# Altium PCB MAIN.PcbDoc
Units mil, origin at the board's own origin, x right, y up, seen from the top; angles counter-clockwise.
Board outline 2851.38 x 3216.54 mil, 4 copper layers (Top Layer, GND Plane, Power Plane, Bottom Layer), stack 66.28 mil thick; 62 components, 112 nets, 379 pads, 433 vias.
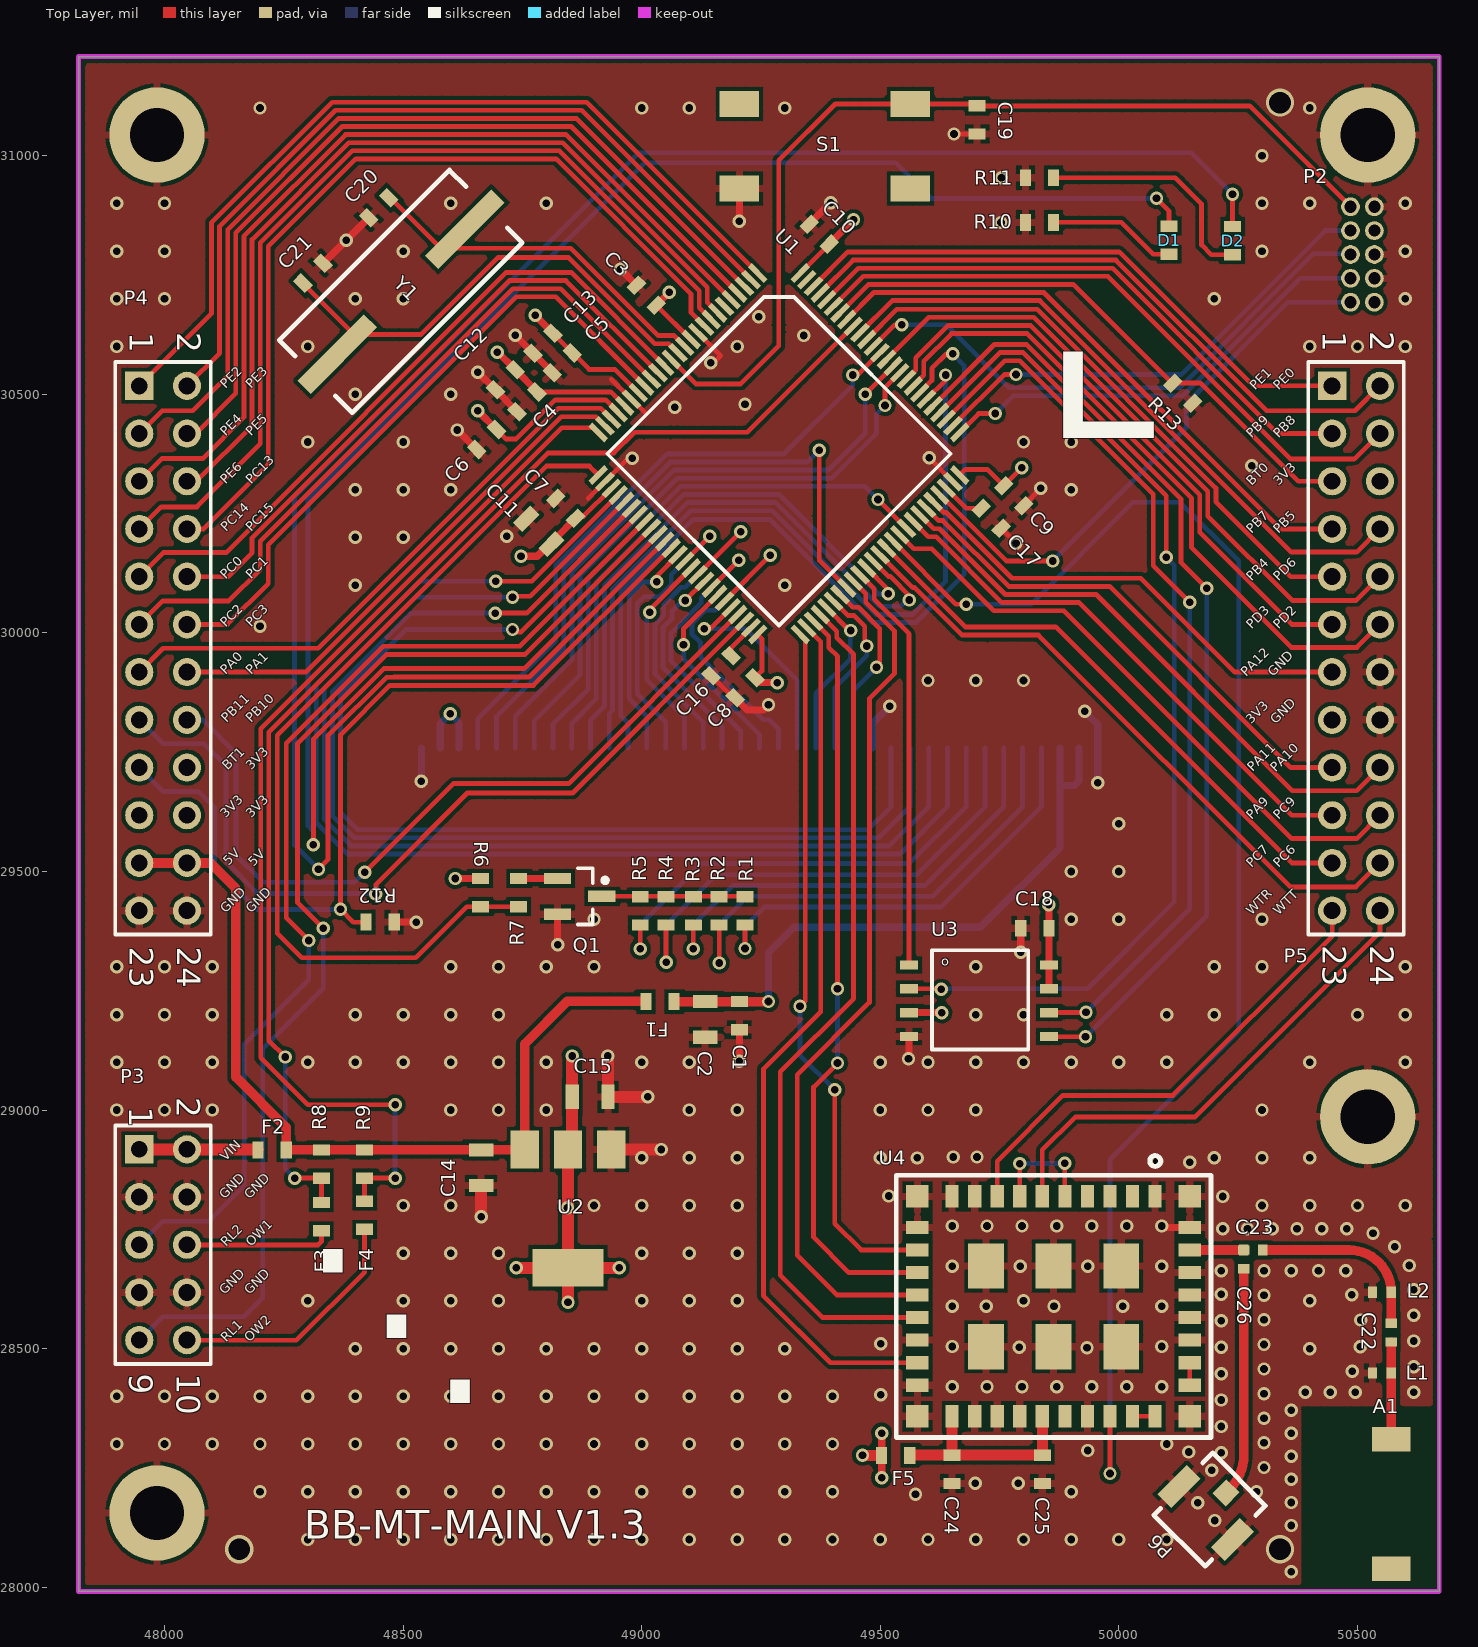
[diagram p0: Top Layer view]
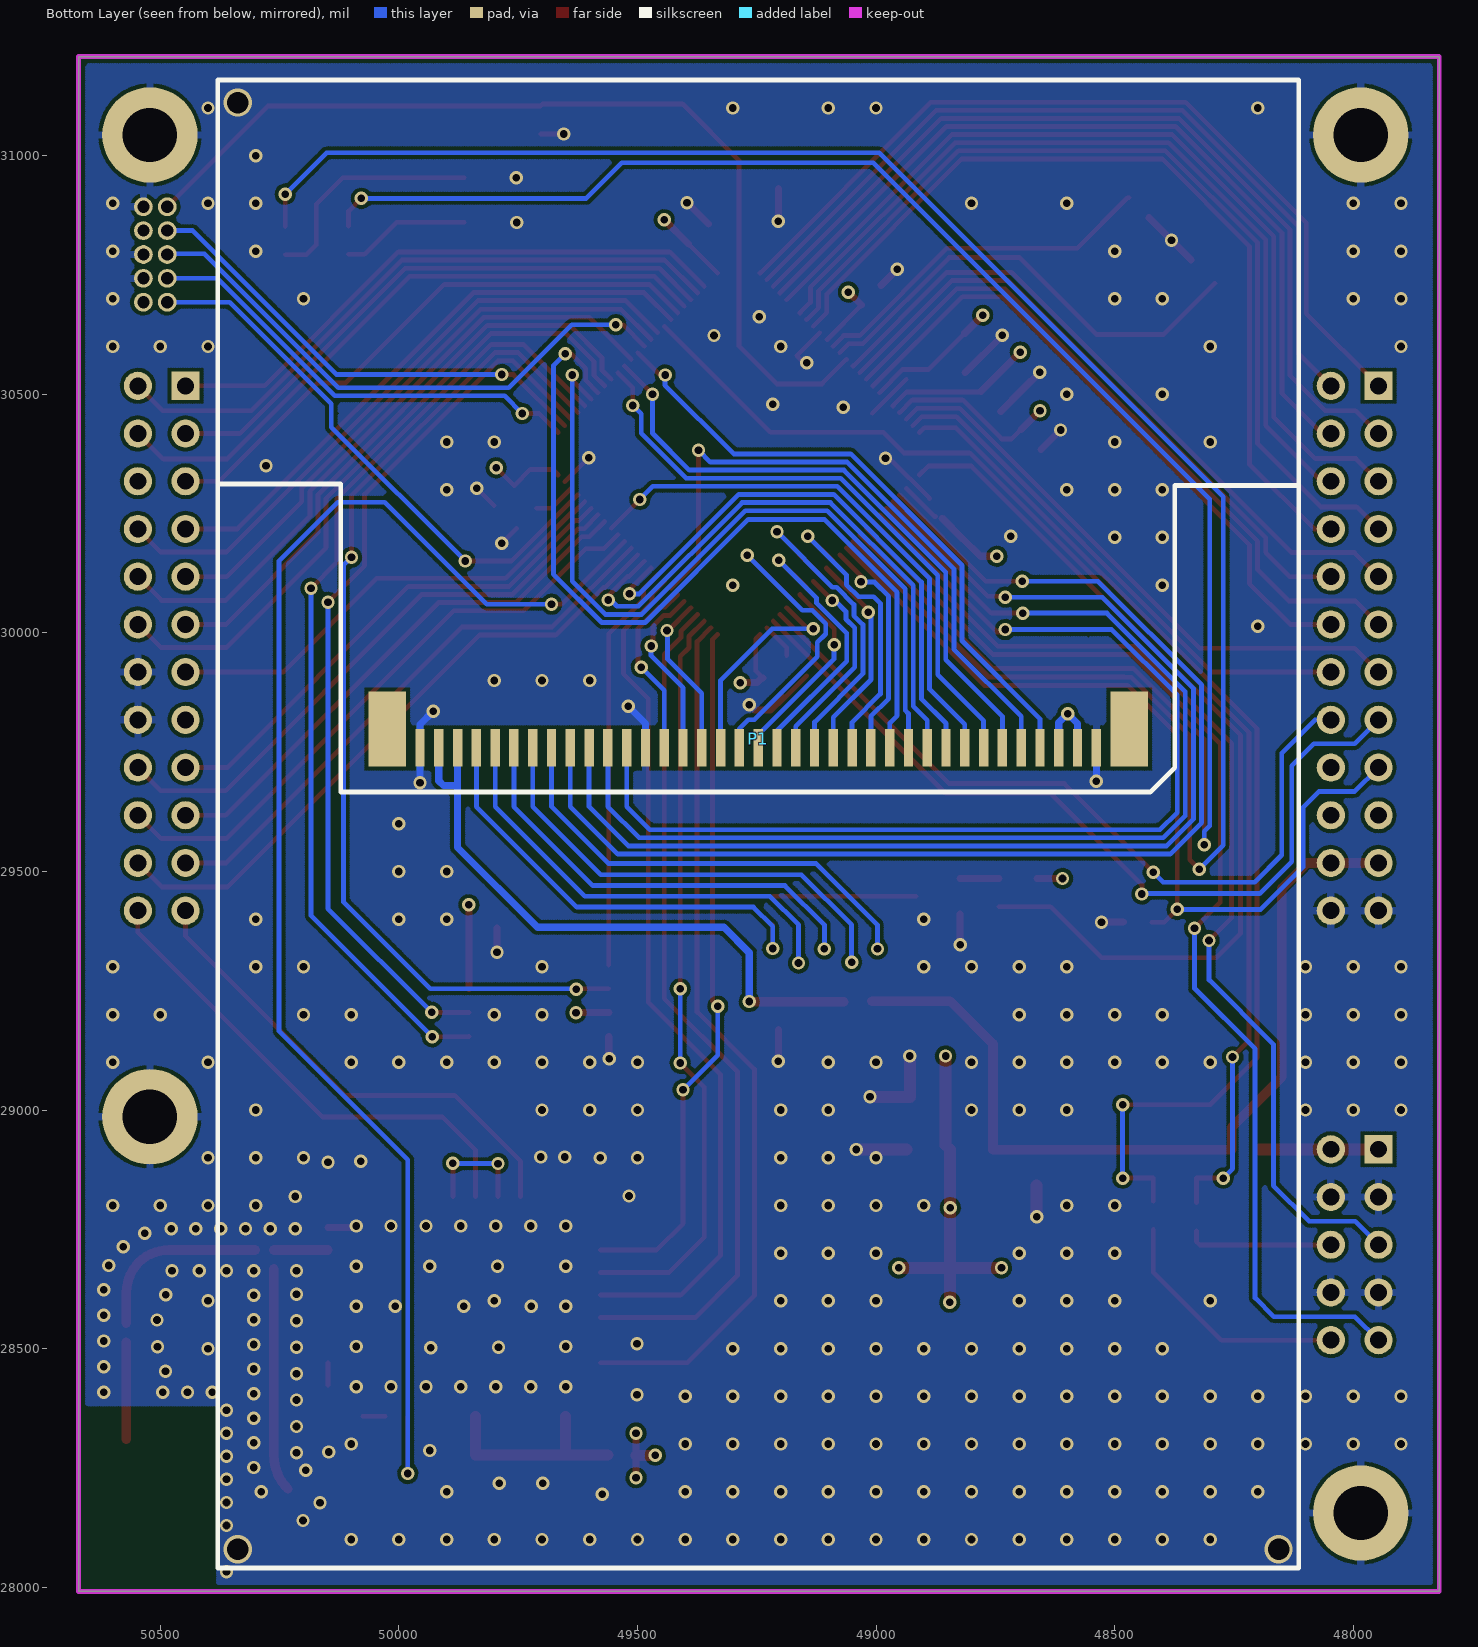
[diagram p1: Bottom Layer view, seen from below]
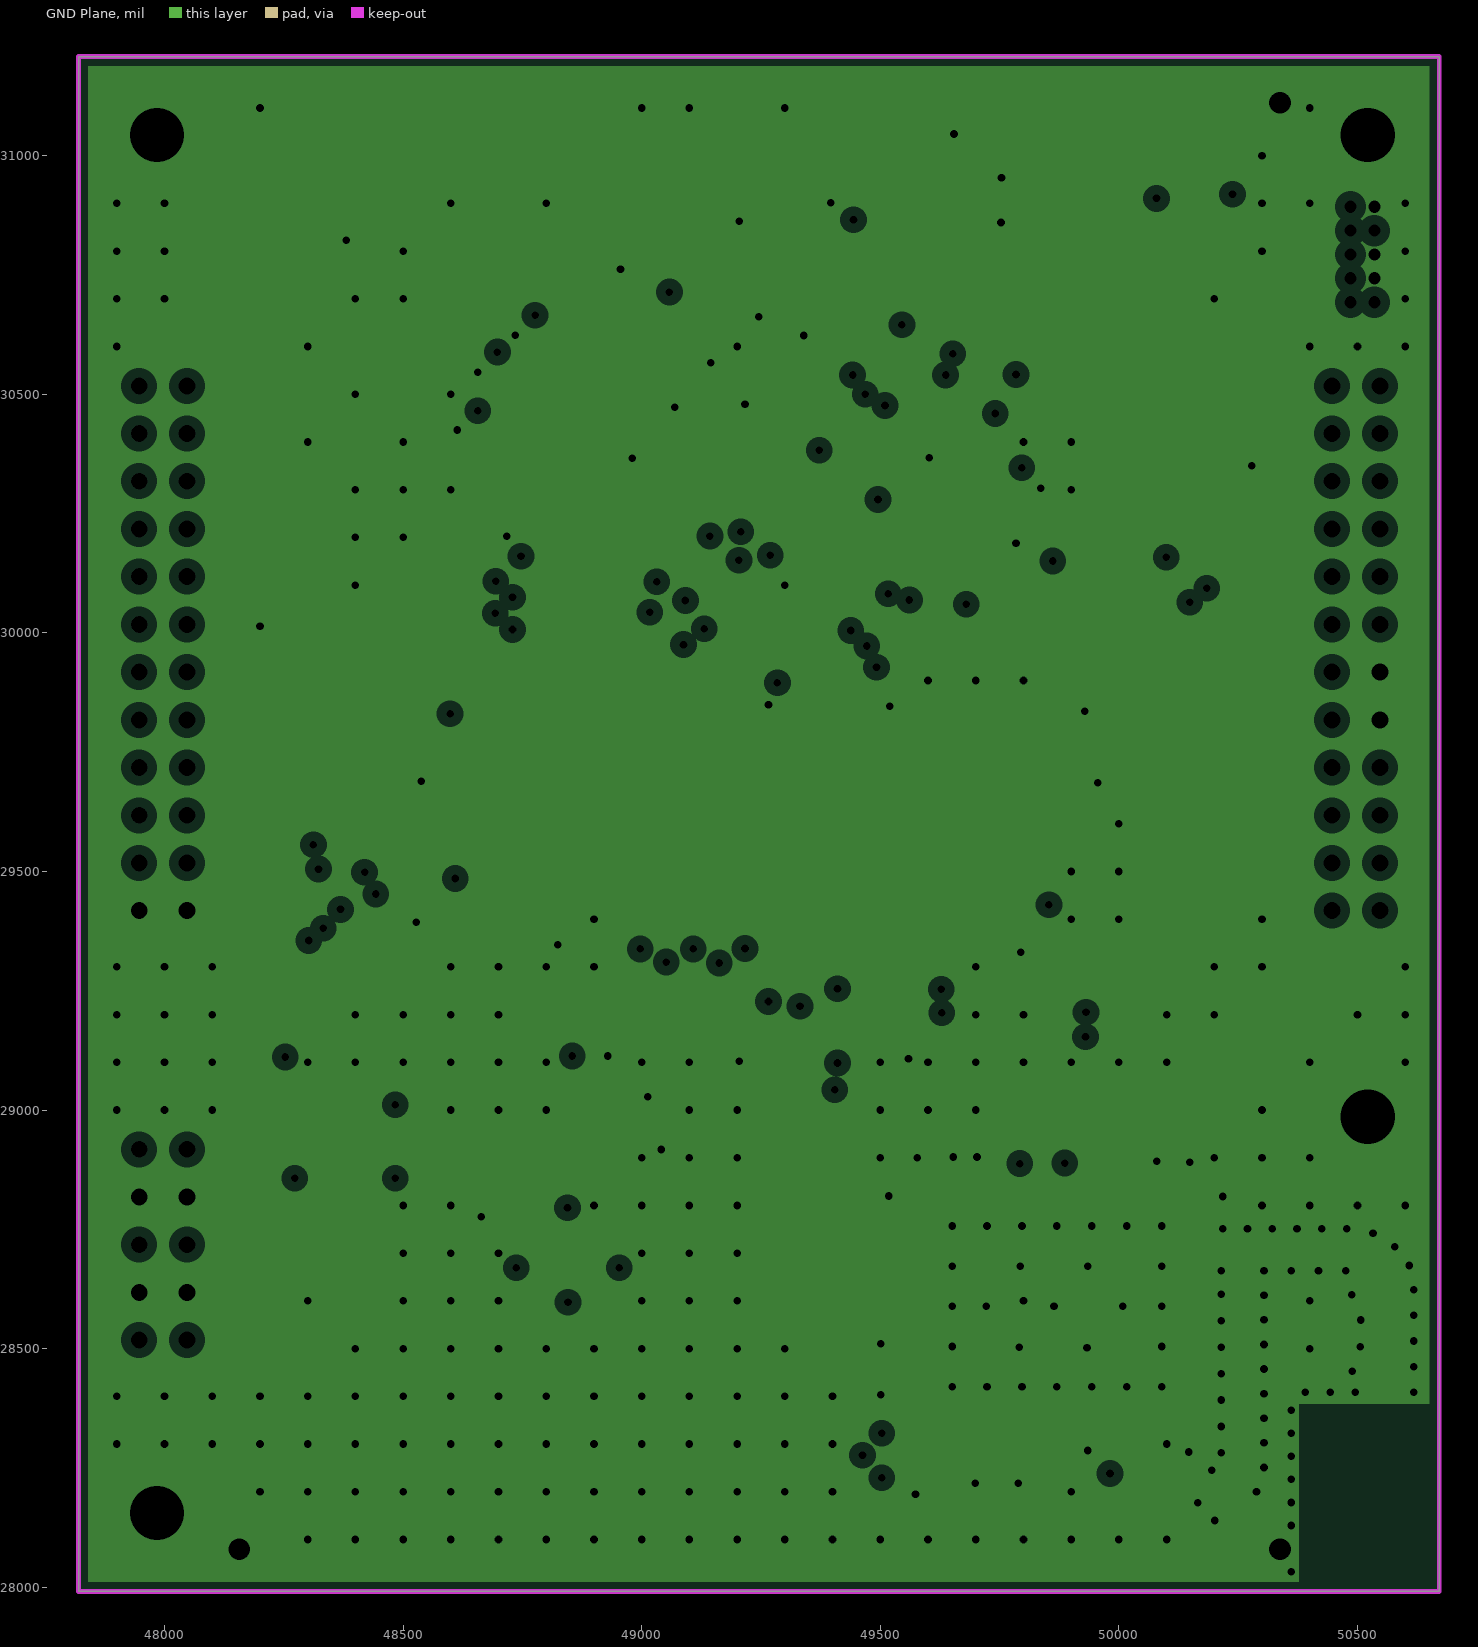
[diagram p2: GND Plane, clearances drawn from the general rule]
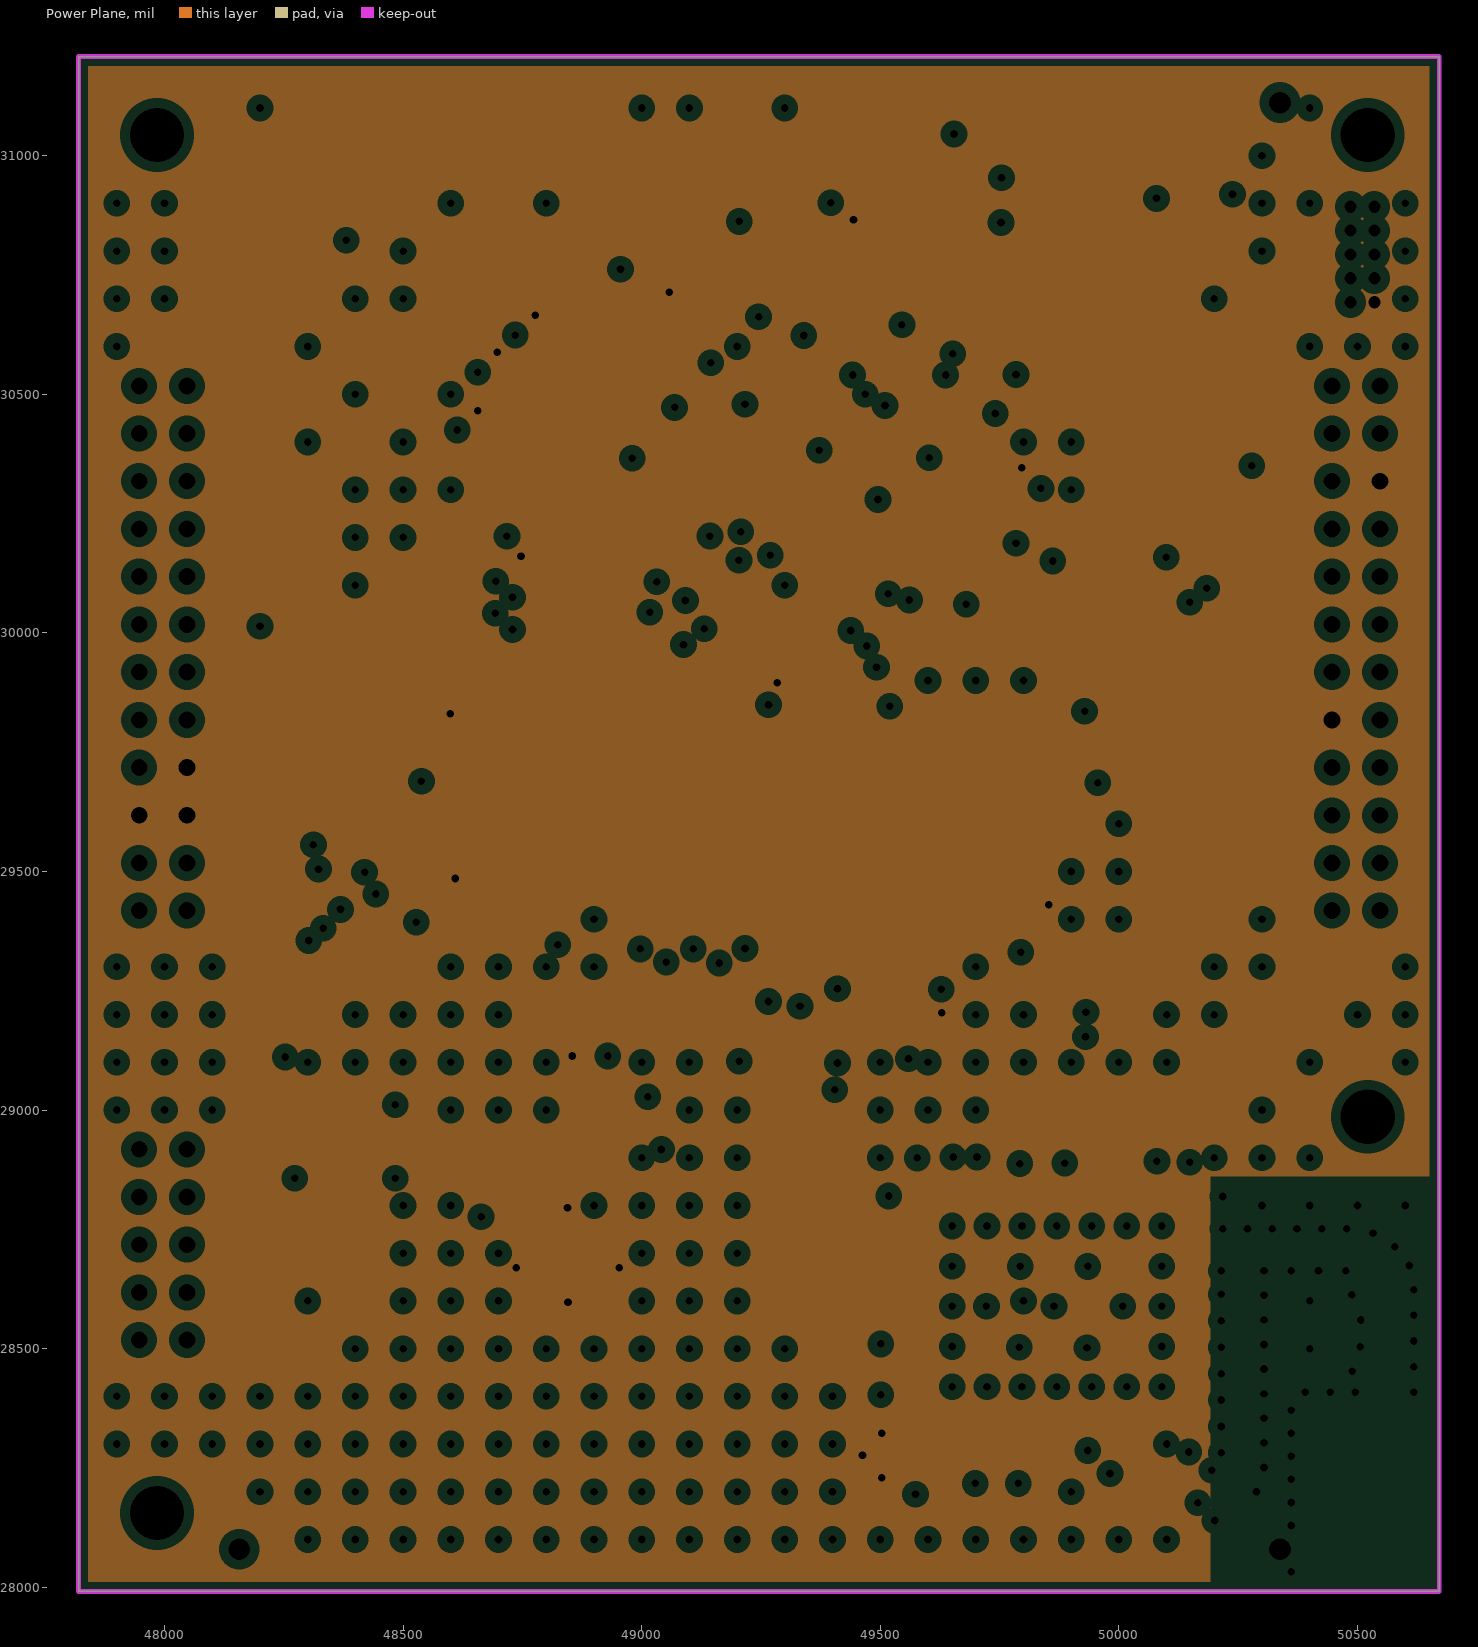
[diagram p3: Power Plane, clearances drawn from the general rule]

## Layer stack, top to bottom
Top Layer: signal copper 1.37
Dielectric: prepreg 12, 2-ply 2116, Dk 4.3
GND Plane: plane copper 1.37, net GND
Dielectric: core 39, FR-4, Dk 4.7
Power Plane: plane copper 1.37, net 3V3
Dielectric: prepreg 9.8, 2-ply 2116, Dk 4.5
Bottom Layer: signal copper 1.37

## Board outline
47819.88,27991.14 47819.88,31207.68 50671.26,31207.68 50671.26,27991.14

## Design rules (kind name [scope] priority, off if disabled: settings)
Clearance AntennaClearance [InNetClass('Antenna Feed-line')] p1: gap=15
Clearance PolygonClearance [InPolygon] p2: gap=8
Clearance [All] p3: gap=7
ComponentClearance [All] p1: gap=10 collisioncheckmode=3 verticalgap=0 showdistances=FALSE
HoleSize [All] p1: absolutevalues=TRUE maxlimit=250 minlimit=15 maxpercent=80.000 minpercent=20.000
MinimumAnnularRing [All] p1: minimumring=5
MinimumSolderMaskSliver FinePitchQFP [InComponent('U1') vs InComponent('U1')] p1: minsoldermaskwidth=3
MinimumSolderMaskSliver [All] p2: minsoldermaskwidth=10
PlaneClearance [All] p1: clearance=20
PlaneConnect [All] p1: planeconnectstyle=Direct reliefexpansion=20 reliefentries=4 reliefconductorwidth=10 reliefairgap=10
PolygonConnect ViaConnect [IsVia] p1: connectstyle=Direct reliefconductorwidth=10 reliefentries=4 polygonreliefangle="90 Angle"
PolygonConnect [All] p2: connectstyle=Relief reliefconductorwidth=15 reliefentries=4 polygonreliefangle="90 Angle"
RoutingPriority [InNet('GND')] p1: routingpriority=100
RoutingVias [All] p1: holewidth=15 width=20 viastyle="Through Hole" minholewidth=10 minwidth=15 maxholewidth=28 maxwidth=300
SMDNeckDown SMDNeckDown5v [InNet('5V')] p1: percent=100.000
SMDNeckDown SMDNeckDown3v3 [InNet('3V3')] p2: percent=100.000
SilkscreenOverComponentPads [All] p1: minsilkscreentomaskgap=10
SolderMaskExpansion [All] p1: expansion=4
Width Width_3V [InNet('3V3')] p1: maxlimit=25 minlimit=10 preferedwidth=25
Width Width_5V [InNet('5V')] p2: maxlimit=25 minlimit=10 preferedwidth=25
Width [All] p3: maxlimit=50 minlimit=10 preferedwidth=10
21 further rules are at their usual default settings.

## Classes and differential pairs
component class LCD: C1 C2 F1 P1 Q1 R1 R2 R3 R4 R5 R6 R7
component class WIFI: A1 C22 C23 C24 C25 C26 F5 L1 L2 P6 U4
component class MAIN: C3 C4 C5 C6 C7 C8 C9 C10 C11 C12 C13 C14 C15 C16 C17 C18 C19 C20 C21 D1 D2 F2 F3 F4 P2 P3 P4 P5 R8 R9 R10 R11 R12 R13 S1 U1 U2 U3 Y1

## Components (designator, comment, footprint, x,y, rotation, side; value= is the part's Value field where it differs from the comment)
A1 "Chip Antenna" 2500AT44M0400 50570.87,28310.04 r270 top
C1 "Cap" 0603 49204.72,29197.84 r90 top
C2 "Cap" 0805 49132.87,29189.96 r90 top
C3 "Cap" 0603 49009.84,30707.68 r315 top
C4 "Cap" 0603 48759.63,30484.04 r45 top
C5 "Cap" 0603 48833.45,30565.73 r45 top
C6 "Cap" 0603 48674.99,30405.3 r45 top
C7 "Cap" 0603 48840.55,30260.83 r315 top
C8 "Cap" 0603 49216.54,29884.84 r45 top
C9 "Cap" 0603 49779.53,30287.4 r135 top
C10 "Cap" 0603 49372.05,30835.63 r315 top
C11 "Cap" 0805 48784.45,30212.6 r315 top
C12 "Cap" 0603 48714.36,30530.3 r45 top
C13 "Cap" 0603 48793.1,30607.07 r45 top
C14 "Cap" 0805 48663.39,28878.94 r90 top
C15 "Cap" 0805 48891.73,29027.56 r180 top
C16 "Cap" 0603 49166.34,29931.1 r45 top
C17 "Cap" 0603 49732.28,30240.16 r135 top
C18 "Cap" 0603 49823.82,29380.91 r0 top
C19 "Cap" 0603 49702.76,31074.8 r90 top
C20 "Cap" 0603 48448.82,30890.75 r45 top
C21 "Cap" 0603 48311.02,30753.94 r225 top
C22 "Cap" 0402 50570.87,28533.46 r270 top
C23 "Cap" 0402 50281.5,28706.69 r0 top
C24 "Cap" 0603 49650.59,28247.05 r90 top
C25 "Cap" 0603 49839.57,28247.05 r90 top
C26 "Cap" 0402 50261.81,28687.01 r270 top
D1 "LED2" 0603 50105.32,30822.83 r270 top
D2 "LED2" 0603 50238.19,30821.85 r270 top
F1 "Ferrite Chip" 0603 49038.39,29227.36 r0 top
F2 "Ferrite Chip" 0603 48225.39,28916.34 r0 top
F3 "Ferrite Chip" 0603 48328.74,28776.57 r270 top
F4 "Ferrite Chip" 0603 48419.29,28779.53 r270 top
F5 "Ferrite Chip" 0603 49532.28,28276.18 r180 top
L1 "Inductor" 0402 50551.18,28448.82 r0 top
L2 "Inductor" 0402 50551.18,28618.11 r0 top
P1 "ER-TFT032-2" INANBO-T32-ILI9320-V11 49247.05,28040.35 r0 bottom locked
P2 "MCU JTAG" "JTAG PTH" 50535.43,30692.91 r180 top
P3 "PWR_BRD" HDR2X5 47947,28917.72 r270 top
P4 "Header 12X2" HDR2X12 47947,30517.72 r270 top locked
P5 "Header 12X2" HDR2X12 50447,30517.72 r270 top locked
P6 "Header 3" U.FL-R-SMT-1 50224.41,28197.83 r135 top
Q1 "NPN" SOT23_M 48870.08,29447.84 r0 top
R1 "Res2" 0603 49216.54,29417.32 r270 top
R2 "Res2" 0603 49162.4,29417.32 r270 top
R3 "Res2" 0603 49108.27,29417.32 r270 top
R4 "Res2" 0603 49051.18,29417.32 r270 top
R5 "Res2" 0603 48997.05,29417.32 r270 top
R6 "Res2" 0603 48662.4,29455.71 r90 top
R7 "Res2" 0603 48742.13,29455.71 r270 top
R8 "Res2" 0603 48328.74,28886.81 r90 top
R9 "Res2" 0603 48419.29,28886.81 r90 top
R10 "Res2" 0603 49833.66,30860.24 r0 top
R11 "Res2" 0603 49833.66,30953.74 r0 top
R12 "Res2" 0603 48451.77,29393.7 r180 top
R13 "Res2" 0603 50133.86,30501.97 r135 top
S1 "SW-PB" FSM4JSMA 49383.86,31019.68 r90 top
U1 "STM32F205" LQFP-100 49243.11,30753.94 r315 top locked
U2 "NCP1117LP" SOT-223 48845.47,28917.32 r180 top
U3 "S25FL032P" SOC008 49545.28,29304.13 r0 top
U4 "CC3000" CC3000 50148.62,28818.9 r270 top locked
Y1 "XTAL" "HC49SD XTAL" 48494.09,30716.54 r45 top

## Footprints (in the part's own frame and the unit in brackets; to place one, negate y for a bottom-side part, rotate by r counter-clockwise, add the part's x,y. Pads: shape width x height; smd on the part's side, far side on the other; paste and mask are expansions set on the pad)
0402 [mm]
  rect 0.5x0.6 smd: 1(-0.5,0) 2(0.5,0)
0603 [mm]
  rect 0.6x0.9 smd: 1(-0.75,0) 2(0.75,0)
0805 [mm]
  rect 0.7x1.3 smd: 1(-0.95,0) 2(0.95,0)
2500AT44M0400 [mm] "2.4 GHz Chip Antenna"
  rect 1.3x2.05 smd: 1(0,0) 2(6.9,0)
CC3000 [mm] "CC3000 WLAN Module"
  rect 1.2x0.7 smd: 1(0,-1.85) 2(0,-3.05) 3(0,-4.25) 4(0,-5.45) 5(0,-6.65) 6(0,-7.85) 7(0,-9.05) 8(0,-10.25) 9(0,-11.45) 10(0,-12.65) 19(11.7,-12.65) 20(11.7,-11.45) 21(11.7,-10.25) 22(11.7,-9.05) 23(11.7,-7.85) 24(11.7,-6.65) 25(11.7,-5.45) 26(11.7,-4.25) 27(11.7,-3.05) 28(11.7,-1.85)
  rect 0.7x1.2 smd: 11(1.65,-14.5) 12(2.85,-14.5) 13(4.05,-14.5) 14(5.25,-14.5) 15(6.45,-14.5) 16(7.65,-14.5) 17(8.85,-14.5) 18(10.05,-14.5) 29(10.05,0) 30(8.85,0) 31(7.65,0) 32(6.45,0) 33(5.25,0) 34(4.05,0) 35(2.85,0) 36(1.65,0)
  rect 2.4x1.9 smd: 37(3.7,-3.65) 38(3.7,-7.25) 39(3.7,-10.85) 40(8,-3.65) 41(8,-7.25) 42(8,-10.85)
  rect 1.2x1.2 smd: 43(0,0) 44(0,-14.5) 45(11.7,-14.5) 46(11.7,0)
  silkscreen extent -2.18,-15.63 12.83,1.13
FSM4JSMA [mm] "SWITCH TACTILE SPST-NO 0.05A 12V"
  rect 1.4x2.1 smd: 1(-2.25,4.55) 2(2.25,-4.55) ""(-2.25,-4.55) ""(2.25,4.55)
"HC49SD XTAL" [mm] "8 MHz Crystal"
  rect 5x1 smd: 1(-4.75,0) 2(4.75,-0.1)
  silkscreen extent -6.4,-2.78 6.4,2.7
HDR2X5 [mm] "Connector; Header; 5x2 Position"
  rect 1.5x1.5 hole 0.9: 1(0,0)
  round 1.5 hole 0.9: 2(0,2.54) 3(2.54,0) 4(2.54,2.54) 5(5.08,0) 6(5.08,2.54) 7(7.62,0) 8(7.62,2.54) 9(10.16,0) 10(10.16,2.54)
  silkscreen extent -1.27,-1.27 11.43,3.81
HDR2X12 [mm] "Connector; Header; 12x2 Position"
  rect 1.5x1.5 hole 0.9: 1(0,0)
  round 1.5 hole 0.9: 2(0,2.54) 3(2.54,0) 4(2.54,2.54) 5(5.08,0) 6(5.08,2.54) 7(7.62,0) 8(7.62,2.54) 9(10.16,0) 10(10.16,2.54) 11(12.7,0) 12(12.7,2.54) 13(15.24,0) 14(15.24,2.54) 15(17.78,0) 16(17.78,2.54) 17(20.32,0) 18(20.32,2.54) 19(22.86,0) 20(22.86,2.54) 21(25.4,0) 22(25.4,2.54) 23(27.94,0) 24(27.94,2.54)
  silkscreen extent -1.27,-1.27 29.21,3.81
INANBO-T32-ILI9320-V11 [mm] "INANBO 3.2\" TFT LCD"
  rect 0.5x2 smd: 1(-18,-43.65) 2(-17,-43.65) 3(-16,-43.65) 4(-15,-43.65) 5(-14,-43.65) 6(-13,-43.65) 7(-12,-43.65) 8(-11,-43.65) 9(-10,-43.65) 10(-9,-43.65) 11(-8,-43.65) 12(-7,-43.65) 13(-6,-43.65) 14(-5,-43.65) 15(-4,-43.65) 16(-3,-43.65) 17(-2,-43.65) 18(-1,-43.65) 19(0,-43.65) 20(1,-43.65) 21(2,-43.65) 22(3,-43.65) 23(4,-43.65) 24(5,-43.65) 25(6,-43.65) 26(7,-43.65) 27(8,-43.65) 28(9,-43.65) 29(10,-43.65) 30(11,-43.65) 31(12,-43.65) 32(13,-43.65) 33(14,-43.65) 34(15,-43.65) 35(16,-43.65) 36(17,-43.65) 37(18,-43.65)
  rect 2x4 smd: ""(-19.755,-44.65) ""(19.745,-44.65)
  silkscreen extent -28.77,-79.2 28.77,0
"JTAG PTH" [mm]
  round 1 hole 0.65 mask+0: 1(0,0) 2(1.27,0) 3(0,-1.27) 4(1.27,-1.27) 5(0,-2.54) 6(1.27,-2.54) 7(0,-3.81) 8(1.27,-3.81) 9(0,-5.08) 10(1.27,-5.08)
LQFP-100 [mm]
  rect 1.2x0.3 smd mask+0.05: 1(0,0) 2(0,-0.5) 3(0,-1) 4(0,-1.5) 5(0,-2) 6(0,-2.5) 7(0,-3) 8(0,-3.5) 9(0,-4) 10(0,-4.5) 11(0,-5) 12(0,-5.5) 13(0,-6) 14(0,-6.5) 15(0,-7) 16(0,-7.5) 17(0,-8) 18(0,-8.5) 19(0,-9) 20(0,-9.5) 21(0,-10) 22(0,-10.5) 23(0,-11) 24(0,-11.5) 25(0,-12) 51(15.2,-12) 52(15.2,-11.5) 53(15.2,-11) 54(15.2,-10.5) 55(15.2,-10) 56(15.2,-9.5) 57(15.2,-9) 58(15.2,-8.5) 59(15.2,-8) 60(15.2,-7.5) 61(15.2,-7) 62(15.2,-6.5) 63(15.2,-6) 64(15.2,-5.5) 65(15.2,-5) 66(15.2,-4.5) 67(15.2,-4) 68(15.2,-3.5) 69(15.2,-3) 70(15.2,-2.5) 71(15.2,-2) 72(15.2,-1.5) 73(15.2,-1) 74(15.2,-0.5) 75(15.2,0)
  rect 0.3x1.2 smd mask+0.05: 26(1.6,-13.6) 27(2.1,-13.6) 28(2.6,-13.6) 29(3.1,-13.6) 30(3.6,-13.6) 31(4.1,-13.6) 32(4.6,-13.6) 33(5.1,-13.6) 34(5.6,-13.6) 35(6.1,-13.6) 36(6.6,-13.6) 37(7.1,-13.6) 38(7.6,-13.6) 39(8.1,-13.6) 40(8.6,-13.6) 41(9.1,-13.6) 42(9.6,-13.6) 43(10.1,-13.6) 44(10.6,-13.6) 45(11.1,-13.6) 46(11.6,-13.6) 47(12.1,-13.6) 48(12.6,-13.6) 49(13.1,-13.6) 50(13.6,-13.6) 76(13.6,1.6) 77(13.1,1.6) 78(12.6,1.6) 79(12.1,1.6) 80(11.6,1.6) 81(11.1,1.6) 82(10.6,1.6) 83(10.1,1.6) 84(9.6,1.6) 85(9.1,1.6) 86(8.6,1.6) 87(8.1,1.6) 88(7.6,1.6) 89(7.1,1.6) 90(6.6,1.6) 91(6.1,1.6) 92(5.6,1.6) 93(5.1,1.6) 94(4.6,1.6) 95(4.1,1.6) 96(3.6,1.6) 97(3.1,1.6) 98(2.6,1.6) 99(2.1,1.6) 100(1.6,1.6)
  silkscreen extent 1.14,-12.46 14.06,0.46
SOC008 [mm]
  rect 0.962x0.495 smd: 1(0.381,0) 2(0.381,-1.27) 3(0.381,-2.54) 4(0.381,-3.81) 5(7.82,-3.81) 6(7.82,-2.54) 7(7.82,-1.27) 8(7.82,0)
  silkscreen extent 1.6,-4.51 6.73,0.77
SOT23_M [mm] "SOT23, 3-Leads, Body 2.9x1.3mm, Pitch 0.95mm, Lead Span 2.3mm - Reverse Pinning, IPC Low Density"
  rect 1.45x0.6 smd: 1(1.175,0) 2(-1.175,-0.95) 3(-1.175,0.95)
  silkscreen extent -0.1,-1.5 1.48,1.5, body extent -0.7,-1.5 0.7,1.5, height 1.1
SOT-223 [mm]
  rect 1.5x2 smd: 1(-2.3,0) 2(0,0) 3(2.3,0)
  rect 3.8x2 smd: 4(0,6.3)
U.FL-R-SMT-1 [mm] "U.FL Connector"
  rect 1.05x2.2 smd: 1(-2,1.525) 3(2,1.525)
  rect 1x1.05 smd: 2(0,0)
  silkscreen extent -1.98,-1 2,3.55

## Part data
A1: library part ANT-SMT-2
C1 C2 C3 C4 C5 C6 C7 C8 C9 C10 C11 C12 C13 C14 C15 C16 C17 C18 C19 C20 C21 C22 C23 C24 C25 C26: "Capacitor"
D1 D2: "Typical RED, GREEN, YELLOW, AMBER GaAs LED"
F1 F2 F3 F4 F5: library part Res2
P1: "3.2\" TFT LCD module with touch panel"
P2 P3: library part "Header 5X2", "Header, 5-Pin, Dual row"
P4 P5: "Header, 12-Pin, Dual row"
P6: "Header, 3-Pin"
Q1: "NPN Bipolar Transistor"
R1 R2 R3 R4 R5 R6 R7 R8 R9 R10 R11 R12 R13: "Resistor"
S1: "Switch"
U1: library part STM32F20x-LQFP100, "STMicroelectronics STM32F20x LQFP100"
U2: "1.0 A Low-Dropout Positive  Fixed and Adjustable  Voltage Regulators"
U3: library part M25P80-VMN6TP, "IC FLASH 8MBIT 75MHZ SO8N"
U4: "CC3000 WLAN Module"
Y1: "Crystal Oscillator"

## Free pads (board coordinates)
  round 200 hole 114.17: ""(47984.25,28155.51) ""(47984.25,31043.31) ""(50521.65,31043.31) ""(50521.65,28985.83)

## Via types
v1: diameter 28, hole 16, Top Layer to Bottom Layer, tented both sides, 430 vias
v2: diameter 59.06, hole 45.28, Top Layer to Bottom Layer, tented both sides, 3 vias

## Nets (pads, with @x,y where several pads share a name; then routed paths per layer and width w, separated by ;. In a path a pad name is that pad's centre, name@x,y a point inside that pad or via, vN(x,y) a via of type N, cw(c..) or ccw(c..) an arc to the next point about the centre after c; other vN are vias at no path point)
3V3: C3.2 C4.2 C5.2 C6.2 C7.2 C8.2 C9.2 C10.2 C11.2 C12.2 C13.2 C15.2 C18.2 F5.2 P1.2 P1.3 P2.1 P4.18 P4.19 P4.20 P5.6 P5.15 R6.2 U1.11 U1.19 U1.21 U1.22 U1.28 U1.50 U1.75 U1.100 U2.2 U2.4 U3.3 U3.7 U3.8 | length 3121
  Top Layer w10: C6.2 48715.55,30406.5 48737.08,30406.5 48818.77,30488.19 48924.24,30488.19 U1.22 ; C4.2 48935.35,30504.92 U1.21 ; C13.2 48889.76,30552.17 48943.78,30552.17 U1.19 ; C11.2@48818.77,30197.96 C11.2@48819.45,30197.96 ; C7.2@48875.3,30243.88 48877.82,30243.88 U1.28 ; C3.2 U1.11@49102.78,30614.74 ; C8.2 49251.97,29920.28 49251.97,29987.86 U1.50 ; U1.100 C10.2@49392.93,30814.67 ; U1.75 49677.99,30342.52 49724.41,30342.52 C9.2 v1(49796.26,30345.89)
  Top Layer w15: v1(48609.25,29485.24) R6.2 ; v1(48656.5,30465.55) C6.2 ; v1@48698.05,30588.37 C12.2 C4.2@48780.51,30505.91 ; v1(48747.05,30160.43) 48781.24,30160.43 C11.2@48818.77,30197.96 ; v1(48776.57,30665.35) C13.2 ; C11.2@48819.45,30197.96 C7.2 ; C3.2 v1(49058.07,30714.15) ; C8.2 49238.91,29905.72 49248.97,29895.67 v1(49284.45,29895.67) ; C10.2 v1(49443.9,30865.72) ; v1(49502.95,28229.33) F5.2@49502.95,28275.98 ; F5.2@49502.95,28276.39 v1(49502.95,28322.83) ; U3.3 v1@49628.54,29204.13 ; U3.7@49853.35,29254.33 C18.2 v1(49853.35,29430.12)
  Top Layer w23: v1@49462.6,28276.18 F5.2
  Top Layer w25: v1(48737.2,28669.29) U2.4 ; v1(48845.47,28597.44) U2.4 ; U2.2 U2.4 ; U2.2@48854.33,28926.18 C15.2 v1(48854.33,29113.19) ; v1(48952.76,28669.29) U2.4
  Bottom Layer w15: P1.2 48577.76,29810.04 v1(48598.43,29830.71) 48617.13,29812.01 P1.3
  other v1: 49462.6,28276.57 48844.49,28795.28 49628.94,29203.74 48697.62,30588.37
5V: C14.2 F1.1 F2.2 P4.21 P4.22 R8.2 R9.2 U2.3 | length 1829
  Top Layer w20: P4.21 48096.46,29517.72 48149.61,29464.57 48149.61,29068.9 48254.92,28963.58 F2.2 U2.3@48754.92,28916.34 ; U2.3 48754.92,29138.78 48844.49,29228.35 F1.1@49008.86,29228.35
BOOT0: P5.5 R13.2 U1.94 | length 1248.4
  Top Layer w10: U1.94 49475.52,30730.23 49904.61,30730.23 50111.22,30523.62 50170.28,30523.62 50376.18,30317.72 P5.5@50468.5,30317.72
BOOT1: P4.17 R12.2 U1.37 | length 1903.8
  Top Layer w10: R12.2 48395.67,29393.7 v1(48368.91,29420.46) 48368.91,29786.24 48472.44,29889.76 48773.14,29889.76 49061.05,30177.67 U1.37
  Bottom Layer w10: P4.17 47997.39,29667.32 48071.85,29667.32 48105.32,29633.86 48105.32,29508.86 48193.72,29420.46 v1(48368.91,29420.46)
D0: P1.9 U1.61 | length 1239.6
  Top Layer w10: U1.61 49516.73,30090.57 v1(49516.73,30081.69)
  Bottom Layer w10: P1.9 48853.35,29810.04 48904.88,29861.57 48904.88,30106.36 49088.52,30290 49287.76,30290 49496.06,30081.69 49523.64,30081.69 49516.73,30088.6 v1(49516.73,30081.69)
D1: P1.10 U1.62 | length 1281
  Top Layer w10: U1.62 49517.03,30118.11 49520.67,30118.11 49562.99,30075.79 49560.04,30072.83 49561.02,30071.85 v1(49561.02,30068.9)
  Bottom Layer w10: P1.10 48892.72,29816.93 48921.88,29846.09 48921.88,30099.32 49095.57,30273 49280.71,30273 49498.02,30055.69 49542.9,30055.69 49560.04,30072.83 49561.02,30071.85 v1(49561.02,30068.9)
D2: P1.11 U1.81 | length 1720.6
  Top Layer w10: U1.81 49636.81,30529.62 v1(49636.81,30540.35)
  Bottom Layer w10: P1.11 48932.09,29830.71 48938.88,29837.5 48938.88,30092.27 49102.61,30256 49273.67,30256 49490.98,30038.69 49567.59,30038.69 49636.81,30107.92 v1(49636.81,30540.35)
D3: P1.12 U1.82 | length 1836.6
  Top Layer w10: U1.82 49608.31,30528.96 49608.31,30554.18 49638.78,30584.65 v1(49651.57,30584.65)
  Bottom Layer w10: P1.12 48971.46,29811.02 48955.88,29826.6 48955.88,30085.23 49108.26,30237.61 49268.02,30237.61 49483.94,30021.69 49574.63,30021.69 49676.18,30123.24 49676.18,30560.04 v1(49651.57,30584.65)
D4: P1.13 U1.38 | length 465.7
  Top Layer w10: v1(49031.42,30107.28) 49031.42,30119.1 U1.38
  Bottom Layer w10: P1.13 49010.83,29824.8 48973.73,29861.9 48973.73,30076.93 49003.28,30106.47 v1@49018.8,30106.47
D5: P1.14 U1.39 | length 625
  Top Layer w10: U1.39 v1(49142.92,30202.76)
  Bottom Layer w10: P1.14 49050.2,29812.57 48990.73,29872.04 48990.73,30061.6 49004.92,30075.79 49036.69,30075.79 49062.01,30101.1 49062.01,30121.85 v1(49142.92,30202.76)
D6: P1.15 U1.40 | length 442.7
  Top Layer w10: v1(49016.73,30043.31) 49016.73,30048.73 U1.40
  Bottom Layer w10: v1@49010.6,30040.14 49010.6,29901.8 49089.57,29822.83 P1.15
D7: P1.16 U1.41 | length 701.2
  Top Layer w10: U1.41 v1(49207.45,30211.61)
  Bottom Layer w10: P1.16 49128.94,29812.99 49027.6,29914.33 49027.6,30017.4 49046.26,30036.07 49046.26,30059.35 49082.38,30095.47 49091.31,30095.47 v1(49207.45,30211.61)
D8: P1.17 U1.42 | length 439.6
  Top Layer w10: v1(49091.59,30067.91) U1.42
  Bottom Layer w10: v1(49091.59,30067.91) 49086.46,30067.91 49063.26,30044.72 49063.26,30029.02 49044.6,30010.36 49044.6,29927.84 49168.31,29804.13 P1.17
D9: P1.18 U1.43 | length 594.9
  Top Layer w10: U1.43 v1(49203.74,30152.22)
  Bottom Layer w10: v1(49203.74,30152.22) 49125,30073.48 49125,30062.83 49061.6,29999.43 49061.6,29940.37 49207.68,29794.29 P1.18
D10: P1.19 U1.44 | length 417.5
  Top Layer w10: v1(49087.6,29975.39) 49087.6,30008.24 U1.44
  Bottom Layer w10: v1(49087.6,29975.39) 49088.04,29975.39 49088.33,29975.1 49088.33,29945.13 49247.05,29786.42 P1.19
D11: P1.20 U1.45 | length 702.5
  Top Layer w10: U1.45 v1(49269.68,30162.49)
  Bottom Layer w10: v1(49269.68,30162.49) 49154.44,30047.24 49133.46,30047.24 49105.33,30019.12 49105.33,29997.58 49123.03,29979.89 49123.03,29949.8 49254.92,29817.91 49267.72,29817.91 49286.42,29799.21 P1.20
D12: P1.21 U1.46 | length 455.2
  Top Layer w10: v1(49131.33,30008.35) 49143.39,30008.35 U1.46
  Bottom Layer w10: v1(49131.33,30008.35) 49218.02,30008.35 49325.79,29900.59 P1.21
D13: P1.22 U1.55 | length 348.6
  Top Layer w10: U1.55 49435.35,30004.92 v1(49437.99,30004.92)
  Bottom Layer w10: P1.22 49365.16,29873.03 49437.01,29944.88 v1@49437.01,30007.87
D14: P1.23 U1.56 | length 370.1
  Top Layer w10: U1.56 49431.69,30036.42 49444.88,30036.42 49467.52,30013.78 v1@49467.52,29972.44
  Bottom Layer w10: P1.23 49404.53,29884.84 49471.46,29951.77 v1(49471.46,29972.44)
D15: P1.24 U1.57 | length 385.7
  Top Layer w10: U1.57 49442.53,30053.42 49454.46,30053.42 49499.02,30008.86 49499.02,29935.04 v1(49492.13,29928.15)
  Bottom Layer w10: P1.24 49443.9,29879.92 v1(49492.13,29928.15)
EXP_RX: P5.22 U1.63 | length 1357
  Top Layer w10: U1.63 49568.08,30094.9 49571.79,30094.9 49671.34,29995.35 49831.28,29995.35 50359.11,29467.52 50496.8,29467.52 P5.22
EXP_TX: P5.21 U1.64 | length 1207.2
  Top Layer w10: U1.64 49678.47,30012.35 49867.57,30012.35 50362.2,29517.72 P5.21
FLASH_CS: U1.60 U3.1 | length 860.4
  Top Layer w10: U1.60 49487.2,30092.26 49487.2,30070.87 49560.28,29997.8 U3.1
FLASH_MISO: U1.79 U3.2 | length 2140.6
  Top Layer w10: U3.2 v1@49626.77,29254.13 ; U1.79 49750.2,30587.33 49799.27,30587.33 50099.41,30287.19 v1(50099.41,30158.46)
  Bottom Layer w10: v1@49626.77,29254.13 49934.25,29254.13 50116.14,29436.02 50116.14,30141.73 v1(50099.41,30158.46)
  other v1: 49627.95,29252.95
FLASH_MOSI: U1.80 U3.5 | length 2038.7
  Top Layer w10: U1.80 49739.36,30604.33 49806.31,30604.33 50129.92,30280.72 50129.92,30147.64 v1(50184.06,30093.5) ; U3.5 49853.74,29153.54 v1(49930.12,29153.54)
  Bottom Layer w10: v1(49930.12,29153.54) 50184.06,29407.48 v1(50184.06,30093.5)
FLASH_SCK: U1.78 U3.6 | length 1885.3
  Top Layer w10: U1.78 49761.04,30570.33 49792.23,30570.33 50071.85,30290.71 50071.85,30140.75 v1(50148.62,30063.98) ; U3.6 v1@49930.51,29204.13
  Bottom Layer w10: v1(49931.1,29204.72) 50148.62,29422.24 v1(50148.62,30063.98)
GND: C1.1 C2.1 C3.1 C4.1 C5.1 C6.1 C7.1 C8.1 C9.1 C10.1 C11.1 C12.1 C13.1 C14.1 C15.1 C16.1 C17.1 C18.1 C19.1 C20.1 C21.1 C24.1 C25.1 L1.1 L2.1 P1.1 P1.25 P1.37 P2.3 P2.5 P2.9 P3.3 P3.4 P3.7 P3.8 P4.23 P4.24 P5.14 P5.16 P6.1 P6.3 pad. Q1.2 R10.1 R11.1 R12.1 R13.1 S1.1 U1.10 U1.20 U1.27 U1.74 U2.1 U3.4 U4.1 U4.9 U4.10 U4.11 U4.16 U4.18 U4.20 U4.21 U4.22 U4.25 U4.31 U4.32 U4.33 U4.34 U4.36 U4.37 U4.38 U4.39 U4.40 U4.41 U4.42 U4.43 U4.44 U4.45 U4.46 | length 2283.4
  Top Layer w10: 48887.8,30281.71 48972.24,30366.14 v1(48980.32,30366.14) ; 48936.61,30531.5 49008.11,30460 ; U1.10 49165.79,30580.71 49151.03,30565.94 v1(49145,30565.94) ; C16.1 49191.72,29863.96 C8.1 ; v1(49602.36,30366.85) U1.74 ; v1(49654.53,31045.28) C19.1 ; C17.1 v1(49784.45,30187.99) ; C9.1 v1(49836.61,30302.73)
  Top Layer w15: C21.1@48339.78,30781.71 C20.1 ; R12.1 v1(48527.56,29393.7) ; v1(48613.33,30425.2) C6.1 ; v1(48656.64,30546.26) C12.1 C4.1@48738.75,30464.15 ; v1(48735.24,30624.02) 48735.24,30623.18 C5.1@48813.06,30545.35 ; v1(48823.82,29346.46) Q1.2 ; v1(48955.71,30761.81) 48958.66,30758.86 C3.1 ; C8.1 49221.04,29838.58 49254.92,29838.58 v1(49265.75,29849.41) ; v1(49204.72,29102.36) C1.1 ; v1(49204.72,30862.2) S1.1 ; C10.1 v1(49396.23,30901.57) ; v1@49560.28,29108.5 U3.4 ; v1(49794.29,29330.71) C18.1 ; v1@50091.54,28753.94 U4.36
  Top Layer w25: v1(48663.39,28776.58) C14.1 ; v1(48929.13,29113.19) C15.1 v1(49012.79,29027.56) ; U2.1 v1(49041.34,28917.32)
  Bottom Layer w15: v1(48538.39,29688.98) P1.1 ; P1.25 49483.27,29810.04 v1(49519.68,29846.46) ; v1(49928.15,29835.63) 49955.71,29808.07 v1(49955.71,29686.02)
  other v1: 50361.22,28032.48 48300,28100 48400,28100 48500,28100 48600,28100 48700,28100 48800,28100 48900,28100 49000,28100 49100,28100 49200,28100 49300,28100 49400,28100 49500,28100 49600,28100 49700,28100 49800,28100 49900,28100 50000,28100 50100,28100 50361.22,28129.22 50200.79,28139.76 50165.35,28177.17 50361.22,28177.59 49573.82,28195 48200,28200 48300,28200 48400,28200 48500,28200 48600,28200 48700,28200 48800,28200 48900,28200 49000,28200 49100,28200 49200,28200 49300,28200 49400,28200 49900,28200 50288.39,28199.8 49698.82,28217.52 49789.37,28217.52 50361.22,28225.96 50194.88,28245.08 50304.13,28250.98 50361.22,28274.33 50214.57,28281.5 50146.65,28283.46 49935.04,28286.42 47900,28300 48000,28300 48100,28300 48200,28300 48300,28300 48400,28300 48500,28300 48600,28300 48700,28300 48800,28300 48900,28300 49000,28300 49100,28300 49200,28300 49300,28300 49400,28300 50100,28300 50304.13,28302.53 50361.22,28322.69 50214.57,28336.9 50304.13,28354.08 50361.22,28371.06 50214.57,28392.29 47900,28400 48000,28400 48100,28400 48200,28400 48300,28400 48400,28400 48500,28400 48600,28400 48700,28400 48800,28400 48900,28400 49000,28400 49100,28400 49200,28400 49300,28400 49400,28400 49500.98,28403.54 50304.13,28405.63 50390.75,28408.46 50442.91,28408.46 50495.08,28408.46 50618.11,28408.46 49650.59,28420.28 49723.75,28420.28 49796.92,28420.28 49870.08,28420.28 49943.24,28420.28 50016.4,28420.28 50089.57,28420.28 50214.57,28447.69 50489.17,28452.76 50304.13,28457.18 50618.11,28462.2 48400,28500 48500,28500 48600,28500 48700,28500 48800,28500 48900,28500 49000,28500 49100,28500 49200,28500 49300,28500 50400,28500 49933.07,28501.97 49791.34,28502.95 50214.57,28503.09 49650.59,28504.43 50089.57,28504.43 50505.91,28503.94 50304.13,28508.73 49500.98,28509.84 50618.11,28515.94 50214.57,28558.49 50304.13,28560.28 50506.89,28560.04 50618.11,28569.68 49650.59,28588.58 49722.44,28588.58 49864.17,28588.58 50007.87,28588.58 50089.57,28588.58 48300,28600 48500,28600 48600,28600 48700,28600 49000,28600 49100,28600 49200,28600 49800,28600 50400,28600 50304.13,28611.83 50488.19,28613.19 50214.57,28613.89 50618.11,28623.42 50214.57,28663.39 50304.13,28663.39 50361.22,28663.39 50418.31,28663.39 50475.39,28663.39 49793.31,28672.24 49935.04,28672.24 49650.59,28672.74 50089.57,28672.74 50608.27,28674.21 48500,28700 48600,28700 48700,28700 49000,28700 49100,28700 49200,28700 50577.76,28713.58 50532.48,28742.13 50217.52,28750.98 50269.49,28750.98 50321.46,28750.98 50373.43,28750.98 50425.39,28750.98 50477.36,28750.98 49650.59,28756.89 49723.75,28756.89 49796.92,28756.89 49870.08,28756.89 49943.24,28756.89 50016.4,28756.89 50089.57,28756.89 48500,28800 48600,28800 48900,28800 49000,28800 49100,28800 49200,28800 50300,28800 50400,28800 50500,28800 50600,28800 50217.52,28818.9 49517.72,28819.88 50148.62,28890.75 50079.72,28892.72 49000,28900 49100,28900 49200,28900 49500,28900 49577.76,28899.61 50200,28900 50300,28900 50400,28900 49652.56,28901.57 49702.76,28901.57 47900,29000 48000,29000 48100,29000 48600,29000 48700,29000 48800,29000 49100,29000 49200,29000 49500,29000 49600,29000 49700,29000 50300,29000 47900,29100 48000,29100 48100,29100 48300,29100 48400,29100 48500,29100 48600,29100 48700,29100 48800,29100 49000,29100 49100,29100 49500,29100 49600,29100 49700,29100 49800,29100 49900,29100 50000,29100 50100,29100 50400,29100 50600,29100 49559.06,29107.28 47900,29200 48000,29200 48100,29200 48400,29200 48500,29200 48600,29200 48700,29200 49700,29200 49800,29200 50100,29200 50200,29200 50500,29200 50600,29200 47900,29300 48000,29300 48100,29300 48600,29300 48700,29300 48800,29300 48900,29300 49700,29300 50200,29300 50300,29300 50600,29300 48900,29400 49900,29400 50000,29400 50300,29400 49900,29500 50000,29500 50000,29600 49600,29900 49700,29900 49800,29900 48200,30013.78 48400,30100 49300,30100 48400,30200 48500,30200 48717.52,30202.5 48400,30300 48500,30300 48600,30300 49900,30300 50278.54,30350.39 48300,30400 48500,30400 49800,30400 49900,30400 49068.9,30472.44 49216.54,30479.33 48400,30500 48600,30500 47900,30600 48300,30600 49200,30600 50400,30600 50500,30600 50600,30600 49339.57,30623.03 49245,30662.4 47900,30700 48000,30700 48400,30700 48500,30700 50200,30700 50600,30700 47900,30800 48000,30800 48500,30800 50300,30800 50600,30800 48380.91,30822.83 49752.95,30860 47900,30900 48000,30900 48600,30900 48800,30900 50300,30900 50400,30900 50600,30900 49753.94,30953.51 50300,31000 48200,31100 49000,31100 49100,31100 49300,31100 50400,31100
  other v2: 48156.5,28079.72 50337.6,28079.72 50337.6,31111.22
JTCK: P2.4 U1.76 | length 953
  Top Layer w10: U1.76 49706.03,30459.65 v1(49741.14,30459.65)
  Bottom Layer w10: v1(49741.14,30459.65) 49778.28,30496.78 50134.16,30496.78 50380.29,30742.91 P2.4
JTDI_MCU: P2.8 U1.77 | length 1002.6
  Top Layer w10: U1.77 49759.89,30541.34 v1(49784.45,30541.34)
  Bottom Layer w10: v1(49784.45,30541.34) 50130.63,30541.34 50432.21,30842.91 P2.8
JTDO_MCU: P2.6 U1.89 | length 1189.5
  Top Layer w10: U1.89 49530.15,30645.67 v1(49545.28,30645.67)
  Bottom Layer w10: v1(49545.28,30645.67) 49637.8,30645.67 49769.68,30513.78 50127.11,30513.78 50407.63,30794.29 P2.6@50485.43,30794.29
JTMS: P2.2 U1.72 | length 1171.7
  Top Layer w10: U1.72 49625.4,30289.03 49763.84,30150.59 v1(49861.22,30150.59)
  Bottom Layer w10: v1(49861.22,30150.59) 50141.73,30431.1 50141.73,30480.31 50354.33,30692.91 P2.2
LED_GRN: D1.1 U1.35 | length 4019.6
  Top Layer w10: v1(48312.01,29556.1) 48312.01,29777.41 48459.79,29925.2 48754,29925.2 U1.35 ; v1(50078.74,30910.43) 50105.31,30883.86 D1.1
  Bottom Layer w10: v1(48312.01,29556.1) 48312.01,29584.23 48300.91,29595.32 48300.91,30280.24 49005.91,30985.24 49532.48,30985.24 49607.28,30910.43 v1(50078.74,30910.43)
LED_RED: D2.1 U1.36 | length 4330.5
  Top Layer w10: v1(48322.83,29504.92) 48342.52,29524.61 48342.52,29783.88 48465.4,29906.76 48479.87,29906.76 48480.59,29907.48 48764.13,29907.48 U1.36 ; D2.1 v1(50238.19,30919.29)
  Bottom Layer w10: v1(48322.83,29504.92) 48272.64,29555.12 48272.64,30284.87 48993.68,31005.91 50151.57,31005.91 v1(50238.19,30919.29)
NetA1_1: A1.1 C22.2 L1.2 | length 203.7
  Top Layer w20: A1.1 C22.2
NetC1_2: C1.2 C2.2 F1.2 P1.35 P1.36 | length 1323.7
  Top Layer w20: F1.2 C1.2 v1(49265.75,29227.36)
  Bottom Layer w15: v1(49265.75,29227.36) 49265.75,29329.72 49318.9,29382.87 49709.65,29382.87 49876.97,29550.2 49876.97,29680.12 ; P1.35 49876.97,29680.12 ; P1.36 49916.34,29689.96 49906.5,29680.12 49876.97,29680.12
NetC16_2: C16.2 U1.49 | length 76
  Top Layer w10: C16.2 49187.22,29968.67 U1.49
NetC17_2: C17.2 U1.73 | length 90.3
  Top Layer w10: U1.73 49680.33,30261.04 C17.2
NetC20_2: C20.2 U1.12 Y1.2 | length 749
  Top Layer w10: C20.2 48473.07,30911.63 48578.67,30806.03 48851.45,30806.03 49034.62,30622.86 49067.96,30622.86 U1.12
NetC21_2: C21.2 U1.13 Y1.1 | length 980.3
  Top Layer w10: C21.2@48289.94,30732.85 48397.71,30625.07 48537.48,30625.07 48698.82,30786.42 48847.02,30786.42 49027.57,30605.86 49057.12,30605.86 U1.13
NetC22_1: C22.1 C23.2 L2.2 | length 385.2
  Top Layer w20: C23.2 50482.28,28706.69 cw(c50482.28,28618.11) L2.2 C22.1
NetC23_1: C23.1 C26.1 U4.35 | length 113.2
  Top Layer w20: U4.35 C26.1
NetC24_2: C24.2 C25.2 F5.1 U4.19 U4.23 | length 442.7
  Top Layer w15: C24.2 ccw(c49651.57,28276.57) C24.2@49651.57,28275.59
  Top Layer w23: F5.1@49561.8,28276.58 C24.2 ; U4.19 C24.2 ; U4.23 C25.2 C24.2
NetC26_2: C26.2 P6.2 | length 469.2
  Top Layer w20: P6.2@50232.52,28205.95 ccw(c50161.81,28276.66) 50261.81,28276.66 C26.2
NetD1_2: D1.2 R10.2 | length 269.8
  Top Layer w10: R10.2 50004.92,30860.24 50071.85,30793.31 D1.2
NetD2_2: D2.2 R11.2 | length 492
  Top Layer w10: R11.2 50118.11,30953.74 50173.23,30898.62 50173.23,30812.99 50193.9,30792.32 D2.2
NetF3_2: F3.2 P3.6 | length 307.5
  Top Layer w10: P3.6@48046.85,28717.32 48321.65,28717.32 48328.74,28724.41 F3.2
NetF4_2: F4.2 P3.10 | length 521.3
  Top Layer w10: P3.10@48046.85,28517.32 48276.18,28517.32 48419.29,28660.43 F4.2
NetP1_30: P1.30 R5.2 | length 1009.2
  Top Layer w10: v1(48997.05,29337.6) R5.2
  Bottom Layer w10: v1(48997.05,29337.6) 48997.05,29387.8 49125.98,29516.73 49560.98,29516.73 49680.12,29635.87 P1.30
NetP1_31: P1.31 R4.2 | length 1049.6
  Top Layer w10: v1(49051.18,29310.04) R4.2
  Bottom Layer w10: v1(49051.18,29310.04) 49051.18,29387.8 49156.5,29493.11 49576.73,29493.11 49719.49,29635.87 P1.31
NetP1_32: P1.32 R3.2 | length 976.7
  Top Layer w10: v1(49108.27,29337.6) R3.2
  Bottom Layer w10: v1(49108.27,29337.6) 49108.27,29387.79 49190.95,29470.47 49593.46,29470.47 49758.86,29635.87 P1.32
NetP1_33: P1.33 R2.2 | length 1021
  Top Layer w10: v1(49162.4,29308.07) R2.2
  Bottom Layer w10: v1(49162.4,29308.07) 49162.4,29387.79 49222.44,29447.83 49610.2,29447.83 49798.23,29635.87 P1.33
NetP1_34: P1.34 R1.2 | length 943.5
  Top Layer w10: v1(49216.54,29338.58) R1.2
  Bottom Layer w10: v1(49216.54,29338.58) 49216.54,29384.84 49256.89,29425.2 49626.93,29425.2 49837.6,29635.87 P1.34
NetQ1_1: Q1.1 R1.1 R2.1 R3.1 R4.1 R5.1 | length 299.2
  Top Layer w10: Q1.1 R1.1@49215.55,29447.83
NetQ1_2: Q1.3 R7.1 | length 81.7
  Top Layer w15: R7.1 Q1.3
NetU4_5: U4.5 U4.7 | length 232.3
  Top Layer w10: U4.7 v1(49792.32,28887.8) ; U4.5 v1(49886.81,28888.78)
  Bottom Layer w10: v1(49792.32,28887.8) v1@49885.83,28887.8
NetU4_27: U4.27 U4.28 | length 47.2
  Top Layer w10: U4.27 U4.28
NetU4_29: U4.29 U4.30 | length 47.2
  Top Layer w10: U4.29 U4.30
OW1: F3.1 R8.1 U1.92 | length 2641.6
  Top Layer w10: v1(48252.95,29111.22) 48218.5,29145.67 48218.5,29791.76 48803.71,30376.97 48941.93,30376.97 48985.24,30420.28 49221.24,30420.28 U1.92 ; v1(48272.64,28857.28) R8.1 F3.1
  Bottom Layer w10: v1(48252.95,29111.22) 48252.95,28876.97 v1(48272.64,28857.28)
OW2: F4.1 R9.1 U1.25 | length 2250.7
  Top Layer w10: F4.1 R9.1 v1(48483.27,28857.28) ; v1(48483.27,29010.83) 48300.2,29010.83 48201.5,29109.52 48201.5,29798.8 48832.55,30429.85 48899.07,30429.85 U1.25
  Bottom Layer w10: v1(48483.27,28857.28) v1(48483.27,29010.83)
PA0: P4.13 U1.23 | length 1228.3
  Top Layer w10: P4.13 47996.8,29967.52 48322.14,29967.52 48825.09,30470.47 48914.12,30470.47 U1.23
PA1: P4.14 U1.24 | length 1105.4
  Top Layer w10: P4.14 48296.38,29917.72 48831.41,30452.75 48904.01,30452.75 U1.24
PA9: P5.19 U1.68 | length 1133.2
  Top Layer w10: U1.68 49600.98,30201.2 49617.07,30201.2 49754.92,30063.35 49916.97,30063.35 50362.6,29617.72 P5.19
PA10: P5.18 U1.69 | length 1223.7
  Top Layer w10: U1.69 49611.82,30218.2 49624.11,30218.2 49761.96,30080.35 49952.13,30080.35 50363.19,29669.29 50498.57,29669.29 P5.18
PA11: P5.17 U1.70 | length 1075.5
  Top Layer w10: U1.70 49622.66,30235.2 49631.15,30235.2 49769,30097.35 49980.41,30097.35 50360.04,29717.72 P5.17
PA12: P5.13 U1.71 | length 984.5
  Top Layer w10: U1.71 49633.49,30252.2 49638.19,30252.2 49776.04,30114.35 50046.09,30114.35 50242.72,29917.72 P5.13
PB4: P5.9 U1.90 | length 1250.7
  Top Layer w10: U1.90 49534.8,30678.15 49828.66,30678.15 50203.47,30303.33 50203.47,30274.87 50360.63,30117.72 P5.9
PB5: P5.8 U1.91 | length 1355.8
  Top Layer w10: U1.91 49525.04,30696.23 49834.62,30696.23 50361.56,30169.29 50498.57,30169.29 P5.8
PB7: P5.7 U1.93 | length 1267.6
  Top Layer w10: U1.93 49486.36,30713.23 49842.87,30713.23 50338.39,30217.72 P5.7@50468.5,30217.72
PB8: P5.4 U1.95 | length 1352.1
  Top Layer w10: U1.95 49464.68,30747.23 49977.18,30747.23 50360.24,30364.17 50493.46,30364.17 P5.4
PB9: P5.3 U1.96 | length 1251.5
  Top Layer w10: U1.96 49453.84,30764.23 49986.9,30764.23 50333.41,30417.72 P5.3@50468.5,30417.72
PB10: P4.16 U1.47 | length 1652.9
  Top Layer w10: v1(48419.29,29498.03) 48605.31,29684.06 48846.93,29684.06 U1.47
  Bottom Layer w10: P4.16 48079.92,29817.72 48149.61,29748.03 48149.61,29534.45 48206.69,29477.36 48398.62,29477.36 v1(48419.29,29498.03)
PB11: P4.15 U1.48 | length 1785
  Top Layer w10: v1(48442.91,29452.76) 48442.91,29472.44 48634.84,29664.37 48855.08,29664.37 U1.48
  Bottom Layer w10: P4.15 47997,29767.72 48082.68,29767.72 48128.94,29721.46 48128.94,29520.67 48195.87,29453.74 v1@48442.91,29453.74
PC0: P4.9 U1.15 | length 1446.5
  Top Layer w10: P4.9 47997.59,30168.31 48128.94,30168.31 48715.82,30755.19 48852.11,30755.19 U1.15
PC1: P4.10 U1.16 | length 1342.5
  Top Layer w10: P4.10 48133.46,30117.72 48183.52,30167.77 48183.52,30198.85 48722.86,30738.19 48841.28,30738.19 U1.16
PC2: P4.11 U1.17 | length 1478.2
  Top Layer w10: P4.11 47996.21,30066.93 48134.84,30066.93 48200.52,30132.61 48200.52,30191.81 48729.9,30721.19 48830.44,30721.19 U1.17
PC3: P4.12 U1.18 | length 1368.9
  Top Layer w10: P4.12 48131.89,30017.72 48217.52,30103.35 48217.52,30184.76 48736.94,30704.19 48819.6,30704.19 U1.18
PC9: P5.20 U1.66 | length 1289.9
  Top Layer w10: U1.66 49570.32,30176.18 49608.27,30176.18 49738.1,30046.35 49884.76,30046.35 50362.2,29568.9 50498.18,29568.9 P5.20
PC13: P4.6 U1.7 | length 1801
  Top Layer w10: P4.6@48047,30317.62 48066.63,30317.62 48183.43,30434.41 48183.43,30824.04 48386.49,31027.11 48834.54,31027.11 49137.52,30724.13 49137.52,30692.5 U1.7
PC14: P4.7 U1.8 | length 1940.6
  Top Layer w10: P4.7 47993.06,30263.78 48067.91,30263.78 48200.43,30396.29 48200.43,30817 48393.53,31010.11 48827.5,31010.11 49120.52,30717.09 49120.52,30681.66 U1.8
PC15: P4.8 U1.9 | length 1841.6
  Top Layer w10: P4.8 48081.89,30217.72 48217.43,30353.25 48217.43,30809.96 48400.57,30993.11 48820.46,30993.11 49103.52,30710.05 49103.52,30670.82 U1.9
PD2: P5.12 U1.83 | length 1394.1
  Top Layer w10: U1.83 49591.31,30539.79 49591.31,30569.03 49649.44,30627.15 49807.53,30627.15 50152.47,30282.21 50152.47,30178.24 50361.22,29969.49 50498.77,29969.49 P5.12
PD3: P5.11 U1.84 | length 1259.4
  Top Layer w10: U1.84 49574.31,30550.63 49574.31,30576.07 49642.39,30644.15 49814.57,30644.15 50169.47,30289.25 50169.47,30210.45 50362.2,30017.72 P5.11
PD6: P5.10 U1.87 | length 1367
  Top Layer w10: U1.87 49601.31,30661.15 49821.62,30661.15 50186.47,30296.29 50186.47,30244.63 50363.19,30067.91 50497.2,30067.91 P5.10
PE0: P5.2 U1.97 | length 1354
  Top Layer w10: U1.97 49443,30781.23 49993.94,30781.23 50309.62,30465.55 50494.83,30465.55 P5.2
PE1: P5.1 U1.98 | length 1233
  Top Layer w10: U1.98 49432.16,30798.23 50000.98,30798.23 50281.5,30517.72 P5.1
PE2: P4.1 U1.1 | length 1802
  Top Layer w10: P4.1 48098.43,30669.14 48098.43,30859.25 48351.28,31112.11 48884.94,31112.11 U1.1
PE3: P4.2 U1.2 | length 1724.3
  Top Layer w10: P4.2 48115.43,30586.14 48115.43,30852.21 48358.32,31095.11 48874.1,31095.11 U1.2
PE4: P4.3 U1.3 | length 1867
  Top Layer w10: P4.3 47994.84,30465.55 48059.06,30465.55 48132.43,30538.92 48132.43,30845.17 48365.37,31078.11 48863.26,31078.11 U1.3
PE5: P4.4 U1.4 | length 1762.4
  Top Layer w10: P4.4 48065.35,30417.72 48149.43,30501.79 48149.43,30838.13 48372.41,31061.11 48852.42,31061.11 U1.4
PE6: P4.5 U1.5 | length 1906.7
  Top Layer w10: P4.5 47994.44,30365.16 48079.72,30365.16 48166.43,30451.86 48166.43,30831.09 48379.45,31044.11 48841.58,31044.11 U1.5
RELAY1: P3.9 U1.34 | length 2461.2
  Top Layer w10: v1(48332.68,29380.91) 48278.64,29434.94 48278.64,29768.09 48465.28,29954.72 48755.69,29954.72 U1.34
  Bottom Layer w10: P3.9@47946.85,28517.32 47996.46,28566.93 48166.34,28566.93 48205.71,28606.3 48205.71,29127.95 48332.68,29254.92 v1(48332.68,29380.91)
RELAY2: P3.5 U1.33 | length 2218.4
  Top Layer w10: v1(48302.17,29355.31) 48254.92,29402.56 48254.92,29768.41 48458.24,29971.72 48744.85,29971.72 U1.33
  Bottom Layer w10: P3.5@47946.85,28717.32 47996.26,28766.73 48092.52,28766.73 48167.32,28841.54 48167.32,29137.8 48302.17,29272.64 v1(48302.17,29355.31)
RESET: C19.2 P2.10 S1.2 U1.14 | length 1998.9
  Top Layer w10: U1.14 49113.49,30521.65 49207.68,30521.65 49287.4,30601.38 49287.4,30990.16 49405.51,31108.27 S1.2 C19.2@49698.82,31108.27 ; C19.2 50274.01,31104.33 P2.10
TFT_BKLT: R6.1 R7.2 U1.26 | length 1900.1
  Top Layer w10: R6.1 48633.86,29426.18 48526.57,29318.9 48287.4,29318.9 48236.22,29370.08 48236.22,29785.43 48800.2,30349.41 48890.42,30349.41 U1.26 ; R6.1@48663.39,29426.18 R7.2
TFT_CS: P1.4 U1.88 | length 1320.8
  Top Layer w10: v1@49447.76,30535.43 U1.88
  Bottom Layer w10: P1.4 48656.5,29819.88 48819.88,29983.27 48819.88,30141.57 49053.32,30375 49298.23,30375 49442.5,30519.28 49442.5,30533.06 v1@49445.87,30536.42
  other v1: 49441.93,30540.35
TFT_RD: P1.7 U1.85 | length 1293.3
  Top Layer w10: v1(49509.84,30476.38) 49509.84,30514 U1.85
  Bottom Layer w10: P1.7 48774.61,29815.95 48870.88,29912.22 48870.88,30120.44 49074.44,30324 49398.06,30324 49492.13,30418.07 49492.13,30458.66 v1(49509.84,30476.38)
TFT_RS: P1.5 U1.58 | length 1384.7
  Top Layer w10: v1(49372.05,30382.87) 49372.05,30151.74 U1.58
  Bottom Layer w10: P1.5 48695.87,29824.81 48836.88,29965.82 48836.88,30134.52 49060.36,30358 49347.17,30358 v1(49372.05,30382.87)
TFT_RST: P1.8 U1.67 | length 1168
  Top Layer w10: v1@49495.44,30278.9 U1.67
  Bottom Layer w10: P1.8 48813.98,29808.07 48887.88,29881.98 48887.88,30113.4 49081.48,30307 49467.61,30307 v1(49495.08,30279.53)
TFT_WR: P1.6 U1.86 | length 1320.8
  Top Layer w10: v1@49466.03,30498.03 U1.86
  Bottom Layer w10: P1.6 48735.24,29824.81 48853.88,29943.45 48853.88,30127.48 49067.4,30341 49391.01,30341 49468.5,30418.49 v1(49468.5,30500)
VIN: F2.1 P3.1 P3.2 | length 249
  Top Layer w25: P3.1@47946.85,28917.32 48046.85,28917.32 F2.1@48195.87,28917.32
WIFI_CS: U1.51 U4.12 | length 1469.9
  Top Layer w10: v1(49331.69,29217.52) 49342.52,29228.35 49342.52,29986.4 U1.51 ; v1(49404.53,29042.32) 49404.53,28761.81 49459.65,28706.69 U4.12
  Bottom Layer w10: v1(49331.69,29217.52) 49331.69,29115.16 v1(49404.53,29042.32)
WIFI_IRQ: U1.59 U4.14 | length 1818.8
  Top Layer w10: U1.59 49469.45,30082.18 49469.45,30064.02 49529.53,30003.94 49529.53,29914.37 49477.36,29862.2 49477.36,29225.39 49325.79,29073.82 49325.79,28695.87 49409.45,28612.2 U4.14
WIFI_MISO: U1.53 U4.13 | length 1581.1
  Top Layer w10: U1.53 49392,29992.59 49392,29969.22 49410.43,29950.79 v1(49410.43,29253.94) ; v1(49410.43,29098.43) 49360.24,29048.23 49360.24,28733.27 49434.06,28659.45 U4.13
  Bottom Layer w10: v1(49410.43,29098.43) v1(49410.43,29253.94)
WIFI_MOSI: U1.54 U4.15 | length 1801.6
  Top Layer w10: U1.54 49409,30003.43 49409,29989.62 49443.9,29954.72 49443.9,29233.27 49290.35,29079.72 49290.35,28653.54 49378.94,28564.96 U4.15
WIFI_SCK: U1.52 U4.17 | length 1842.2
  Top Layer w10: U1.52 49375,29981.76 49375,29205.71 49255,29085.71 49255,28611.14 49395.67,28470.47 U4.17
WIFI_SW_EN: U1.65 U4.26 | length 3062
  Top Layer w10: U1.65 49658.62,30060.04 v1(49680.12,30060.04) ; v1(49981.3,28238.19) U4.26
  Bottom Layer w10: v1(49680.12,30060.04) 49815.94,30060.04 50029.53,30273.62 50127.95,30273.62 50250.98,30150.59 50250.98,29165.35 49981.3,28895.67 49981.3,28881.93 v1(49981.3,28238.19)
WTR: P5.23 U4.8 | length 1024.5
  Top Layer w10: U4.8 49745.08,28892.72 49882.87,29030.51 50113.19,29030.51 50447,29364.32 P5.23
WTT: P5.24 U4.6 | length 1038.9
  Top Layer w10: U4.6 49839.57,28916.34 49908.46,28985.24 50159.45,28985.24 50547,29372.79 P5.24
X+: P1.29 U1.29 | length 2600.7
  Top Layer w10: v1(48693.9,30108.27) 48770.04,30108.27 U1.29
  Bottom Layer w10: v1(48693.9,30108.27) 48535.16,30108.27 48317.91,29891.02 48317.91,29602.36 48383.86,29536.42 49541.3,29536.42 49640.75,29635.87 P1.29
X-: P1.27 U1.31 | length 2425.6
  Top Layer w10: v1(48692.91,30041.34) 48758.79,30041.34 U1.31
  Bottom Layer w10: v1(48692.91,30041.34) 48516.31,30041.34 48351.91,29876.94 48351.91,29616.45 48397.94,29570.42 49496.56,29570.42 49562.01,29635.87 P1.27
Y+: P1.28 U1.30 | length 2514.3
  Top Layer w10: v1(48729.33,30074.8) 48729.33,30076.77 48766.38,30076.77 U1.30
  Bottom Layer w10: v1(48729.33,30074.8) 48525.74,30074.8 48334.91,29883.98 48334.91,29609.4 48390.9,29553.42 49518.93,29553.42 49601.38,29635.87 P1.28
Y-: P1.26 U1.32 | length 2350.6
  Top Layer w10: v1(48729.33,30006.89) 48729.33,30005.91 48725.39,30001.97 48747.26,30001.97 U1.32
  Bottom Layer w10: v1(48729.33,30006.89) 48505.91,30006.89 48368.91,29869.9 48368.91,29623.49 48404.98,29587.42 49474.19,29587.42 49522.64,29635.87 P1.26
pads on no net: A1.2 P1. P2.7 S1. U1.6 U1.99 U4.2 U4.3 U4.4 U4.24

## Polygon pours and split planes (outlines as drawn)
GND on Top Layer "Top Layer-No Net" (hatched 90Degree grid 5 track 10, remove dead copper, pour order 4): 47819.88,31207.68 50671.26,31207.68 50671.26,27991.14 47819.88,27991.14 47819.88,31207.68
GND on Bottom Layer "Top Layer-No Net" (hatched 90Degree grid 5 track 10, remove dead copper, pour order 2): 47819.88,31207.68 50671.26,31207.68 50671.26,27991.14 47819.88,27991.14 47819.88,31207.68
GND on GND Plane (split plane): 50651.16,28383.86 50377.95,28383.86 50377.95,28011.24 47839.98,28011.24 47839.98,31187.58 50651.16,31187.58
3V3 on Power Plane (split plane): 50651.16,28860 50192.24,28860 50192.24,28011.24 47839.98,28011.24 47839.98,31187.58 50651.16,31187.58

## Keep-outs
Keep-Out Layer:
  the board outline again, w10

## Other copper
GND Plane (plane layer: these items are gaps in the copper):
  pour cut-out: 50377.95,28383.86 50377.95,27995.08 50671.26,27995.08 50671.26,28383.86
Power Plane (plane layer: these items are gaps in the copper):
  pour cut-out: 50192.24,27995.08 50671.26,27995.08 50671.26,28860 50192.24,28860
Multi-Layer:
  pour cut-out: 50671.26,28383.86 50671.26,27995.08 50377.95,27995.08 50377.95,28383.86

## Silkscreen, mask and mechanical layers (free items; w line width, h text height)
Top Overlay:
  text "PE2" at 48127.81,30510.83 h20 r45
  text "PE3" at 48182.09,30510.83 h20 r45
  text "PE1" at 50285.37,30506.89 h20 r45
  text "PE0" at 50334.65,30506.89 h20 r45
  text "PE4" at 48127.81,30410.83 h20 r45
  text "PE5" at 48182.09,30410.83 h20 r45
  text "PB9" at 50278.71,30406.89 h20 r45
  text "PB8" at 50334.65,30406.89 h20 r45
  text "PE6" at 48127.81,30310.83 h20 r45
  text "PC13" at 48182.09,30310.83 h20 r45
  text "BT0" at 50278.71,30306.89 h20 r45
  text "3V3" at 50334.65,30306.89 h20 r45
  text "PC14" at 48128.94,30210.63 h20 r45
  text "PC15" at 48182.09,30210.83 h20 r45
  text "PB7" at 50278.71,30206.89 h20 r45
  text "PB5" at 50334.65,30206.89 h20 r45
  text "L" at 49842.52,30199.8 h1100
  text "PC0" at 48127.81,30110.83 h20 r45
  text "PC1" at 48182.09,30110.83 h20 r45
  text "PB4" at 50278.71,30106.89 h20 r45
  text "PD6" at 50334.65,30106.89 h20 r45
  text "PC2" at 48127.81,30010.83 h20 r45
  text "PC3" at 48182.09,30010.83 h20 r45
  text "PD3" at 50278.71,30006.89 h20 r45
  text "PD2" at 50334.65,30006.89 h20 r45
  text "PA0" at 48127.81,29910.83 h20 r45
  text "PA1" at 48182.09,29910.83 h20 r45
  text "PA12" at 50266.73,29906.5 h20 r45
  text "GND" at 50323.82,29906.5 h20 r45
  text "PB11" at 48129.92,29811.02 h20 r45
  text "PB10" at 48182.09,29810.83 h20 r45
  text "3V3" at 50277.56,29807.09 h20 r45
  text "GND" at 50328.74,29807.09 h20 r45
  text "BT1" at 48132.87,29710.63 h20 r45
  text "3V3" at 48182.09,29710.83 h20 r45
  text "PA11" at 50280.51,29707.68 h20 r45
  text "PA10" at 50328.74,29706.69 h20 r45
  text "3V3" at 48127.81,29610.83 h20 r45
  text "3V3" at 48182.09,29610.83 h20 r45
  text "PA9" at 50278.71,29606.89 h20 r45
  text "PC9" at 50334.65,29606.89 h20 r45
  text "5V" at 48134.84,29510.83 h20 r45
  text "5V" at 48187.01,29508.86 h20 r45
  text "PC7" at 50278.71,29506.89 h20 r45
  text "PC6" at 50334.65,29506.89 h20 r45
  text "GND" at 48127.81,29410.83 h20 r45
  text "GND" at 48182.09,29410.83 h20 r45
  text "WTR" at 50278.71,29406.89 h20 r45
  text "WTT" at 50334.65,29406.89 h20 r45
  text "VIN" at 48127.95,28891.73 h20 r45
  text "GND" at 48125.93,28812.2 h20 r45
  text "GND" at 48178.15,28812.2 h20 r45
  text "RL2" at 48129.86,28712.2 h20 r45
  text "OW1" at 48182.09,28712.2 h20 r45
  text "GND" at 48125.93,28612.2 h20 r45
  text "GND" at 48178.15,28612.2 h20 r45
  text "RL1" at 48128.94,28511.81 h20 r45
  text "OW2" at 48178.15,28512.2 h20 r45
  text "⋱" at 48286.42,28326.77 h500
  text "BB-MT-MAIN V1.3" at 48292.32,28101.38 h60

## Text inside footprints (layer, text, board x,y; h text height)
P3: Top Overlay "10" at 48026.02,28446.89 h50 r270; Top Overlay "9" at 47926.02,28446.89 h50 r270; Top Overlay "1" at 47926.02,29006.57 h50 r270; Top Overlay "2" at 48026.02,29026.57 h50 r270
P4: Top Overlay "2" at 48027,30629.53 h50 r270; Top Overlay "1" at 47927,30629.53 h50 r270; Top Overlay "23" at 47927,29341.97 h50 r270; Top Overlay "24" at 48027,29341.97 h50 r270
P5: Top Overlay "24" at 50527,29344.92 h50 r270; Top Overlay "23" at 50427,29344.92 h50 r270; Top Overlay "2" at 50527,30632.48 h50 r270; Top Overlay "1" at 50427,30632.48 h50 r270
U3: Top Overlay "o" at 49627.95,29302.17 h19.68